# Altium PCB x-IMU3-SA-GPS.PcbDoc
Units mm, origin at the board's own origin, x right, y up, seen from the top; angles counter-clockwise.
Board outline 14 x 22 mm, 2 copper layers (Top Layer, Bottom Layer), stack 1.569 mm thick; 12 components, 15 nets, 55 pads, 11 vias.
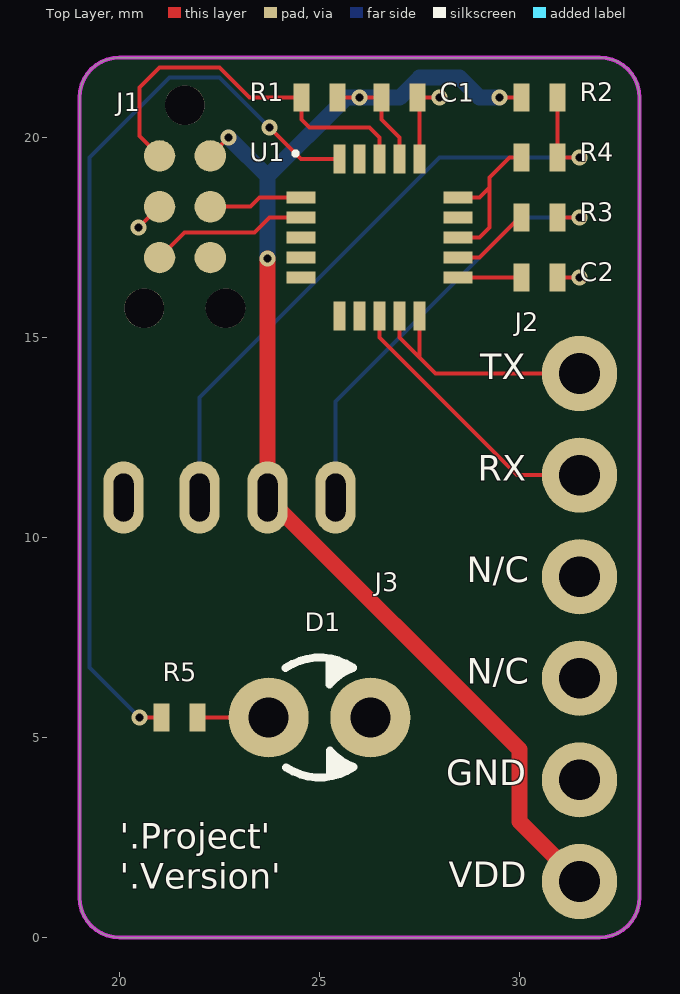
[diagram p0: Top Layer view]
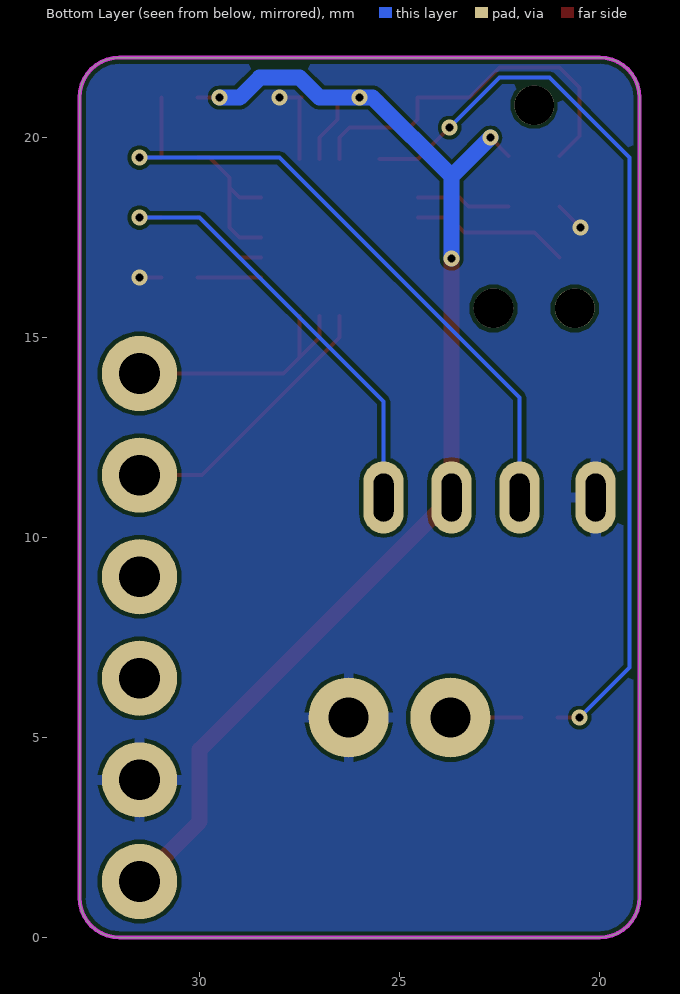
[diagram p1: Bottom Layer view, seen from below]

## Layer stack, top to bottom
Top Solder: solder mask 0.0254, SM-001, Dk 4
Top Layer: signal copper 0.035
Dielectric 1: core 1.4986, Core-043, Dk 4.3
Bottom Layer: signal copper 0.035
Bottom Solder: solder mask 0.0254, SM-001, Dk 4

## Board outline
19,1 19,21 cw(c20,21) 20,22 32,22 cw(c32,21) 33,21 33,1 cw(c32,1) 32,0 20,0 cw(c20,1)

## Design rules (kind name [scope] priority, off if disabled: settings)
Clearance [All] p1: gap=0.1 ignorepadtopadclearanceinfootprint=FALSE except(0: Arc-Hole Track-Hole SMDPad-Hole THPad-Hole Via-Hole Fill-Hole Poly-Hole Region-Hole Text-Hole)
DiffPairsRouting [All] p1: maxlimit=0.254 minlimit=0.1 mostfreqgap=0.1 toplayer_minwidth=0.1 toplayer_maxwidth=0.381 toplayer_prefwidth=0.1 bottomlayer_minwidth=0.1 bottomlayer_maxwidth=0.381 bottomlayer_prefwidth=0.1 maxuncoupledlength=12.7
HoleSize [All] p1: absolutevalues=TRUE maxlimit=10 minlimit=0.025 maxpercent=80.000 minpercent=20.000
MinimumSolderMaskSliver [All] p1: minsoldermaskwidth=0
PlaneClearance [All] p1: clearance=0.2
PlaneConnect [All] p1: planeconnectstyle=Direct reliefexpansion=0.508 reliefentries=4 reliefconductorwidth=0.254 reliefairgap=0.254
PolygonConnect [All] p1: thpad.connectstyle=Relief thpad.reliefconductorwidth=0.254 thpad.reliefentries=4 thpad.polygonreliefangle="90 Angle" thpad.airgapwidth=0.1 smdpad.connectstyle=Relief smdpad.reliefconductorwidth=0.254 smdpad.reliefentries=4 smdpad.polygonreliefangle="90 Angle" smdpad.airgapwidth=0.1 via.connectstyle=Direct via.reliefconductorwidth=0.254 via.reliefentries=4 via.polygonreliefangle="90 Angle" via.airgapwidth=0.254
RoutingVias [All] p1: holewidth=0.711 width=1.27 viastyle="Through Hole" minholewidth=0.2 minwidth=0.4 maxholewidth=0.711 maxwidth=1.27
SilkToSolderMaskClearance [IsPad] p1: minsilkscreentomaskgap=0.1 clearancetoexposedcopper=TRUE
SolderMaskExpansion [All] p1: expansion=0.102 istentingtop=FALSE
SupplyNets "Schematic Supply Nets_1" [InNet('VDD')] p1: voltage=0.000
SupplyNets "Schematic Supply Nets" [InNet('GND')] p2: voltage=0.000
Width [All] p1: maxlimit=1 minlimit=0.1 preferedwidth=0.1
24 further rules are at their usual default settings.

## Components (designator, comment, footprint, x,y, rotation, side; value= is the part's Value field where it differs from the comment)
C1 "100nF" "Capacitor 0402" 27,21 r180 top
C2 "10uF" "Capacitor 0402" 30.5,16.5 r180 top
D1 "WP424QR51WT/D-AMT" "LED 3MM" 25,5.5 r0 top
J1 "DNP" "Tag Connect No Legs" 21.635,20.81 r270 top
J2 "BG304-06-A-0500-L-G" BG304-06-A-0500-L-G 31.5,7.75 r180 top
J3 "SP-3541" SP-3541 22,11 r0 top
R1 "10kR" "Resistor 0402" 25,21 r0 top
R2 "10kR" "Resistor 0402" 30.5,21 r180 top
R3 "470R" "Resistor 0402" 30.5,18 r0 top
R4 "470R" "Resistor 0402" 30.5,19.5 r0 top
R5 "470R" "Resistor 0402" 21.5,5.5 r180 top
U1 "PIC32MM0064GPL020-I/ML" QFN-20 26.5,17.5 r0 top

## Footprints (in the part's own frame and the unit in brackets; to place one, negate y for a bottom-side part, rotate by r counter-clockwise, add the part's x,y. Pads: shape width x height; smd on the part's side, far side on the other; paste and mask are expansions set on the pad)
BG304-06-A-0500-L-G [mil]
  round 74 hole 40: 1(0,250) 2(0,150) 3(0,50) 4(0,-50) 5(0,-150) 6(0,-250)
  body extent -209,-300 13,300, height 100
"Capacitor 0402" [mm]
  rect 0.4x0.7 smd: 1(-0.45,0) 2(0.45,0)
  body extent -0.5,-0.25 0.5,0.25, height 0.48
"LED 3MM" [mm]
  round 2 hole 1: A(-1.27,0) K(1.27,0)
  silkscreen extent -0.85,-1.5 0.85,1.5, body extent -1.9,-1.9 1.53,1.9, height 11.64
QFN-20 [mm]
  rect 0.73x0.3 smd: 1(-1.965,1) 2(-1.965,0.5) 3(-1.965,0) 4(-1.965,-0.5) 5(-1.965,-1) 11(1.965,-1) 12(1.965,-0.5) 13(1.965,0) 14(1.965,0.5) 15(1.965,1)
  rect 0.3x0.73 smd: 6(-1,-1.965) 7(-0.5,-1.965) 8(0,-1.965) 9(0.5,-1.965) 10(1,-1.965) 16(1,1.965) 17(0.5,1.965) 18(0,1.965) 19(-0.5,1.965) 20(-1,1.965)
  silkscreen extent -2.15,2.05 -2.05,2.15, body extent -2.02,-2.02 2.02,2.02, height 0.8
"Resistor 0402" [mm]
  rect 0.4x0.7 smd: 1(-0.45,0) 2(0.45,0)
  body extent -0.51,-0.25 0.49,0.25, height 0.34
SP-3541 [mm]
  oval 1x1.8 hole 0.5 slot 1.2 at 90 deg: R1(1.7,0) R2(0,0) S(-1.9,0) T(3.4,0)
  body extent -21.25,-2.5 5.25,2.5, height 5
"Tag Connect No Legs" [mil]
  round 31 smd paste-99999: 1(50,-25) 2(50,25) 3(100,-25) 4(100,25) 5(150,-25) 6(150,25)
  round 39 hole 39 unplated: Pin(0,0) Pin(200,-40) Pin(200,40)

## Part data
C1 C2: library part Capacitor
D1: library part LED
J1: library part "MPLAB ICSP"
R1 R2 R3 R4 R5: library part Resistor

## Via types
v1: diameter 0.4, hole 0.2, Top Layer to Bottom Layer, tented both sides, 11 vias

## Nets (pads, with @x,y where several pads share a name; then routed paths per layer and width w, separated by ;. In a path a pad name is that pad's centre, name@x,y a point inside that pad or via, vN(x,y) a via of type N, cw(c..) or ccw(c..) an arc to the next point about the centre after c; other vN are vias at no path point)
GND: C1.1 C2.1 D1.K J1.3 J2.2 J3.S U1.16 | length 3.3
  Top Layer w0.1: v1(20.48,17.75) J1.3 ; C1.1 v1(28,21) ; U1.16 C1.1@27.5,20.95 ; C2.1 v1(31.5,16.5)
LED: R5.2 U1.20 | length 23
  Top Layer w0.1: v1(20.5,5.5) R5.2 ; v1(23.75,20.25) 24.535,19.465 U1.20
  Bottom Layer w0.1: v1(20.5,5.5) 19.25,6.75 19.25,19.5 21.25,21.5 22.5,21.5 v1(23.75,20.25)
"LED R": D1.A R5.1 | length 1.8
  Top Layer w0.1: R5.1 D1.A
MCLR: J1.1 R1.1 U1.18 | length 9.7
  Top Layer w0.1: J1.1 20.5,20.04 20.5,21.25 21,21.75 22.5,21.75 23.25,21 R1.1 24.55,20.45 24.75,20.25 26.25,20.25 26.5,20 U1.18
PGEC: J1.5 U1.2 | length 3.9
  Top Layer w0.1: J1.5 21.625,17.625 23.375,17.625 23.75,18 U1.2
PGED: J1.4 U1.1 | length 2.4
  Top Layer w0.1: J1.4 23.27,18.27 23.5,18.5 U1.1
"TRRS RX": R3.1 U1.12 | length 2
  Top Layer w0.1: U1.12 29,17 30,18 R3.1
"TRRS RX R": J3.T R3.2 | length 11
  Top Layer w0.1: R3.2 v1(31.5,18)
  Bottom Layer w0.1: J3.T 25.4,13.4 30,18 v1(31.5,18)
"TRRS TX": R4.1 U1.13 U1.15 | length 4
  Top Layer w0.1: U1.13 29,17.5 29.25,17.75 29.25,18.75 ; U1.15 29,18.5 29.25,18.75 ; R4.1 29.75,19.5 29.25,19 29.25,18.75
"TRRS TX R": J3.R2 R2.1 R4.2 | length 16.5
  Top Layer w0.1: R2.1 R4.2 v1(31.5,19.5)
  Bottom Layer w0.1: J3.R2 22,13.5 28,19.5 v1(31.5,19.5)
U1TX: U1.14
"ublox RX": J2.5 U1.8 | length 7
  Top Layer w0.1: U1.8 26.5,15 29.94,11.56 J2.5
"ublox TX": J2.6 U1.9 U1.10 | length 6.4
  Top Layer w0.1: U1.9 27,15 27.5,14.5 ; U1.10 27.5,14.5 ; J2.6 27.9,14.1 27.5,14.5
VCAP: C2.2 U1.11 | length 1.6
  Top Layer w0.1: U1.11 C2.2
VDD: C1.2 J1.2 J2.1 J3.R1 R1.2 R2.2 U1.17 | length 33.3
  Top Layer w0.1: J1.2 v1(22.73,20) ; R1.2 v1(26,21) C1.2 26.55,20.45 27,20 U1.17 ; v1(29.5,21) R2.2
  Top Layer w0.4: v1(23.7,16.975) J3.R1 30,4.7 30,2.9 J2.1
  Bottom Layer w0.4: v1(22.73,20) 23.7,19.03 ; v1(23.7,16.975) 23.7,19.03 ; v1(29.5,21) 29,21 28.5,21.5 27.5,21.5 27,21 v1(26,21) 25.67,21 23.7,19.03
pads on no net: J1.6 J1.Pin J2.3 J2.4 U1.3 U1.4 U1.5 U1.6 U1.7 U1.19

## Polygon pours and split planes (outlines as drawn)
GND on Bottom Layer "NONET_L-01_P-001" (solid, remove dead copper, pour order 0): 19,0 19,22 33,22 33,0

## Keep-outs
Keep-Out Layer:
  the board outline again, w0.1

## Silkscreen, mask and mechanical layers (free items; w line width, h text height)
Top Overlay:
  text "TX" at 29.019,13.748 h1.1
  text "RX" at 28.96,11.208 h1.1
  text "N/C" at 28.682,8.669 h1.1
  text "N/C" at 28.682,6.129 h1.1
  text "GND" at 28.164,3.589 h1.1
  text "'.Project'" at 20,2.013 h1.1
  text "VDD" at 28.226,1.048 h1.1
  text "'.Version'" at 20,1.012 h1.1